# Altium PCB Elevate_sch.PcbDoc (part 2 of 2)
Units mm, origin at the board's own origin, x right, y up, seen from the top; angles counter-clockwise.
Board outline 81.14 x 61.52 mm, 2 copper layers (Top Layer, Bottom Layer), stack 1.554 mm thick; 108 components, 119 nets, 558 pads, 275 vias.
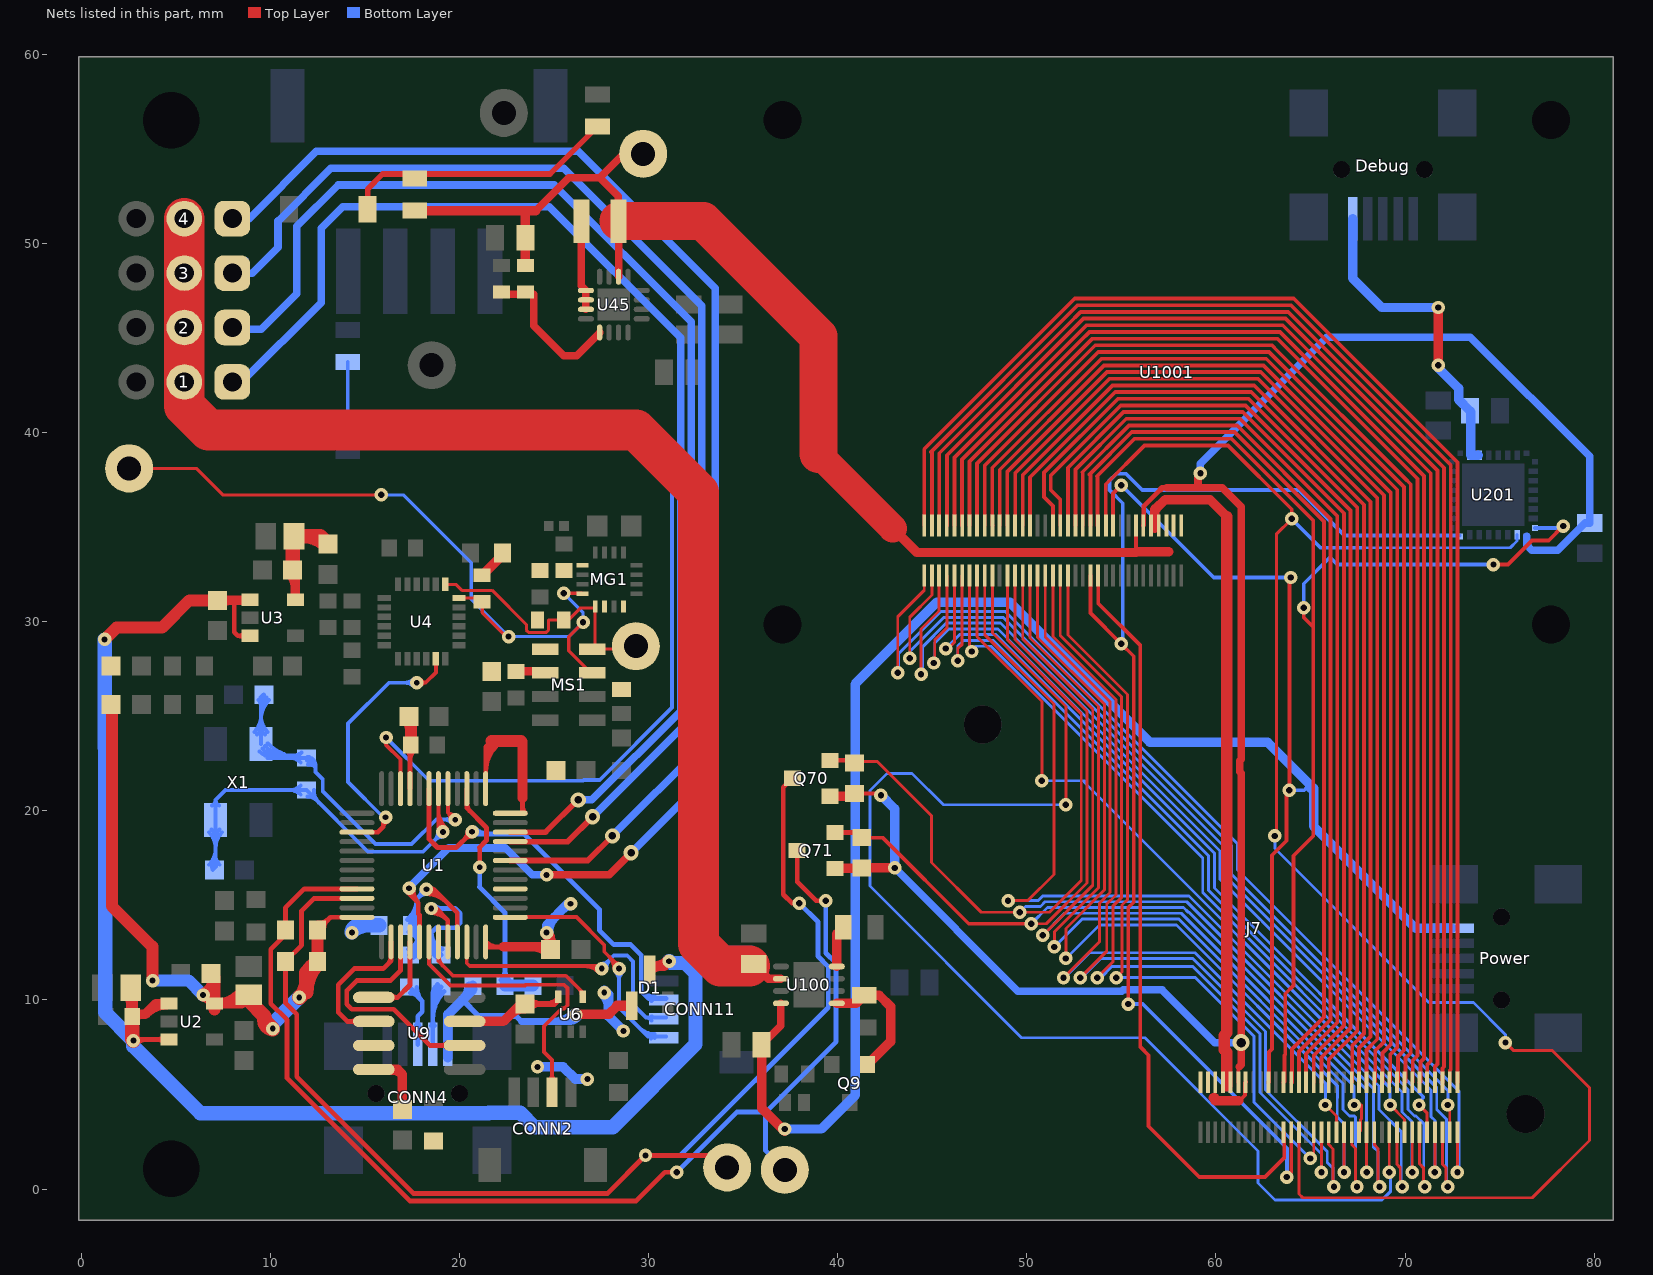
[diagram p2: the nets of this part, all layers, seen from the top]

## Via types
v1: diameter 0.711, hole 0.332, Top Layer to Bottom Layer, 90 vias
v2: diameter 0.8, hole 0.4, Top Layer to Bottom Layer, 85 vias
v3: diameter 0.711, hole 0.305, Top Layer to Bottom Layer, tented both sides, 66 vias
v4: diameter 0.66, hole 0.33, Top Layer to Bottom Layer, tented top, 9 vias
v5: diameter 0.69, hole 0.33, Top Layer to Bottom Layer, 6 vias
v6: diameter 0.5, hole 0.2, Top Layer to Bottom Layer, tented top, 5 vias
v7: diameter 0.5, hole 0.2, Top Layer to Bottom Layer, 5 vias
v8: diameter 1.1, hole 0.7, Top Layer to Bottom Layer, 4 vias
v9: diameter 0.9, hole 0.5, Top Layer to Bottom Layer, 3 vias
v10: diameter 0.73, hole 0.332, Top Layer to Bottom Layer, 1 vias
v11: diameter 1, hole 0.6, Top Layer to Bottom Layer, 1 vias

## Nets (pads, with @x,y where several pads share a name; then routed paths per layer and width w, separated by ;. In a path a pad name is that pad's centre, name@x,y a point inside that pad or via, vN(x,y) a via of type N, cw(c..) or ccw(c..) an arc to the next point about the centre after c; other vN are vias at no path point) (continued)
NetJ7_24: J7.24 U201.32 U1001.24 | length 66.4
  Top Layer w0.2: U1001.24@53.776,35.081 53.747,35.081 53.747,37.665 53.722,37.69 55.699,39.667 60.834,39.667 65.151,35.35 65.151,29.718 ; J7.24@63.576,5.639 63.628,5.691 63.628,7.069 63.67,7.111 63.67,10.33 64.107,10.767 64.107,17.625 65.151,18.669 65.151,29.718 ; v1(64.643,30.734) 64.643,30.226 65.151,29.718 ; v1(74.676,33.02) 75.438,33.02 76.708,34.29 77.597,34.29 v1(78.359,35.052)
  Bottom Layer w0.2: v1(64.643,30.734) 64.643,32.004 66.04,33.401 66.421,33.02 v1(74.676,33.02) ; U201.32@76.876,34.953 78.26,34.953 v1(78.359,35.052)
NetJ7_25: J7.25 U201.8 U1001.25 | length 68.2
  Top Layer w0.2: U1001.25@53.369,32.44 53.369,30.451 v1(54.991,28.829) 55.654,28.166 55.654,15.163 55.372,14.881 v1(55.372,9.779) ; v1(63.754,0.635) 63.983,0.864 J7.25@63.983,2.997
  Bottom Layer w0.2: v1(54.991,28.829) 55.081,28.919 55.081,36.26 54.382,36.959 54.382,37.463 54.739,37.82 55.243,37.82 56.106,36.957 64.389,36.957 66.796,34.55 U201.8@72.879,34.55 ; v1(55.372,9.779) 56.134,9.779 63.754,2.159 v1(63.754,0.635)
NetJ7_26: J7.26 U1001.26 | length 48.4
  Top Layer w0.2: U1001.26@53.369,35.081 53.369,37.729 53.316,37.783 55.553,40.02 60.98,40.02 65.711,35.289 65.711,9.095 64.023,7.407 64.023,5.639 J7.26@63.983,5.639
NetJ7_27: J7.27 U201.2 U1001.22 | length 90.5
  Top Layer w0.154: v1(63.119,18.669) 63.197,18.747 63.197,34.622 v1(64.008,35.433) ; J7.27@64.389,2.997 64.389,-0.254 64.594,-0.459 76.727,-0.459 79.751,2.565 79.751,5.36 77.775,7.336 75.722,7.336 v1(75.311,7.747)
  Top Layer w0.2: U1001.22@54.182,35.081 54.182,37.263 56.233,39.314 60.635,39.314 64.008,35.941 v1(64.008,35.433)
  Bottom Layer w0.154: v1(63.119,18.669) 63.119,17.999 71.26,9.858 73.614,9.858 75.311,8.161 v1(75.311,7.747) ; 67.818,33.909 75.565,33.909 75.926,34.27 U201.2@75.926,34.603
  Bottom Layer w0.2: v1(64.008,35.433) 65.532,33.909 67.818,33.909
NetJ7_28: J7.28 U1001.28 | length 49.5
  Top Layer w0.2: U1001.28@52.963,35.081 52.963,37.873 52.935,37.901 55.407,40.373 61.126,40.373 66.064,35.435 66.064,8.949 64.389,7.274 J7.28@64.389,5.639
NetJ7_30: J7.30 U1001.30 | length 50.7
  Top Layer w0.2: U1001.30@52.582,35.081 52.582,38.047 55.261,40.726 61.273,40.726 66.417,35.582 66.417,8.802 64.77,7.155 J7.30@64.77,5.639
NetJ7_31: J7.31 U1001.31 | length 40.5
  Top Layer w0.152: U1001.31@52.176,32.44 52.176,29.293 55.325,26.144 55.325,15.3 55.043,15.018 55.043,11.482 v1(54.737,11.176) ; v1(64.991,1.618) 65.176,1.803 J7.31@65.176,2.997
  Bottom Layer w0.152: v1(54.737,11.176) 58.928,11.176 62.02,8.084 62.02,4.59 v1(64.991,1.618)
NetJ7_32: J7.32 U1001.32 | length 51.8
  Top Layer w0.2: U1001.32@52.176,35.081 52.176,38.14 55.115,41.079 61.419,41.079 66.77,35.728 66.77,8.656 65.176,7.063 J7.32@65.176,5.639
NetJ7_33: J7.33 U1001.33 | length 44.3
  Top Layer w0.152: U1001.33@51.769,32.364 U1001.33@51.769,32.44 51.769,29.268 55.019,26.018 55.019,15.426 54.57,14.977 54.57,12.025 v1(53.721,11.176) ; v1(65.583,0.889) J7.33@65.583,2.997
  Bottom Layer w0.152: v1(53.721,11.176) 53.91,11.176 54.495,11.761 58.775,11.761 62.326,8.21 62.326,5.111 65.583,1.854 v1(65.583,0.889)
NetJ7_34: J7.34 U1001.34 | length 53.4
  Top Layer w0.2: U1001.34@51.769,35.081 51.769,36.459 51.271,36.957 51.271,37.735 54.968,41.432 61.565,41.432 67.123,35.874 67.123,8.51 65.583,6.97 J7.34@65.583,5.639
NetJ7_35: J7.35 U1001.35 | length 48
  Top Layer w0.152: U1001.35@51.388,32.39 U1001.35@51.388,32.44 51.388,29.217 54.714,25.891 54.714,15.553 54.229,15.068 54.229,12.573 v1(52.832,11.176) ; J7.35@65.964,2.997 65.964,2.349 66.192,2.121 66.192,0.178 v1(66.243,0.127)
  Bottom Layer w0.152: v1(52.832,11.176) 52.894,11.176 53.91,12.192 58.776,12.192 62.631,8.337 62.631,5.238 65.888,1.981 65.888,1.411 66.168,1.131 66.192,1.131 66.192,0.178 v1(66.243,0.127)
NetJ7_36: J7.36 U1001.36 | length 54.6
  Top Layer w0.2: U1001.36@51.388,35.081 51.388,36.115 50.918,36.585 50.918,37.881 54.822,41.785 61.72,41.785 67.476,36.029 67.476,8.364 65.964,6.851 J7.36@65.964,5.639
NetJ7_37: J7.37 U1001.37 | length 43.8
  Top Layer w0.152: U1001.37@50.982,32.44 50.982,29.191 54.409,25.765 54.409,15.679 53.856,15.127 53.856,13.089 v1(51.943,11.176) ; v1(65.786,4.445) 66.37,3.861 J7.37@66.37,2.997
  Bottom Layer w0.152: v1(51.943,11.176) 52.005,11.176 53.326,12.497 58.902,12.497 65.786,5.614 v1(65.786,4.445)
NetJ7_39: J7.39 U1001.39 | length 48
  Top Layer w0.152: U1001.39@50.575,32.44 50.575,29.166 54.103,25.638 54.103,15.806 52.07,13.773 v1(52.07,12.192) ; v1(66.777,0.889) J7.39@66.777,2.997
  Bottom Layer w0.152: v1(52.07,12.192) 53.848,13.97 57.912,13.97 66.421,5.461 66.421,4.815 66.42,4.814 66.42,3.811 66.777,3.454 v1(66.777,0.889)
NetJ7_41: J7.41 U1001.41 | length 50.5
  Top Layer w0.152: U1001.41@50.169,32.44 50.169,29.14 53.798,25.512 53.798,15.932 51.459,13.593 v1(51.459,12.803) ; J7.41@67.183,2.997 67.183,2.349 67.386,2.147 67.386,0.204 v1(67.462,0.127)
  Bottom Layer w0.152: v1(51.459,12.803) 52.931,14.275 58.038,14.275 66.726,5.587 66.726,4.688 66.725,4.687 66.725,4.203 67.068,3.86 67.322,3.86 67.386,3.796 67.386,0.204 v1(67.462,0.127)
NetJ7_42: J7.42 U1001.42 | length 55.3
  Top Layer w0.2: U1001.42@50.169,35.081 50.169,37.631 54.676,42.138 61.875,42.138 67.829,36.184 67.829,8.217 67.209,7.598 J7.42@67.209,5.665
NetJ7_43: J7.43 U1001.43 | length 45.3
  Top Layer w0.152: U1001.43@49.788,32.44 49.788,29.09 53.492,25.385 53.492,16.059 v1(50.848,13.414) ; v1(67.31,4.445) 67.691,4.445 67.691,3.715 67.64,3.664 67.64,3.073 J7.43@67.564,2.997
  Bottom Layer w0.152: v1(50.848,13.414) 52.014,14.581 58.165,14.581 67.31,5.435 v1(67.31,4.445)
NetJ7_44: J7.44 U1001.44 | length 56.5
  Top Layer w0.2: U1001.44@49.788,35.081 49.788,37.749 54.53,42.491 62.03,42.491 62.991,41.53 67.437,37.084 68.182,36.339 68.182,8.071 67.564,7.453 J7.44@67.564,5.639
NetJ7_45: J7.45 Q71.2 R502.1 U1001.45 | length 62.6
  Top Layer w0.152: U1001.45@49.382,32.44 49.382,29.064 53.187,25.259 53.187,16.185 51.027,14.025 v1(50.237,14.025) ; v1(67.97,0.889) J7.45@67.97,2.997
  Top Layer w0.2: R502.1@41.275,18.58 42.38,18.58 46.935,14.025 v1(50.237,14.025)
  Top Layer w0.254: Q71.2@39.862,18.857 40.998,18.857 R502.1@41.275,18.58
  Bottom Layer w0.152: v1(50.237,14.025) 51.097,14.886 58.291,14.886 58.54,14.638 58.58,14.638 67.97,5.247 v1(67.97,0.889)
NetJ7_46: J7.46 U1001.46 | length 57.7
  Top Layer w0.2: U1001.46@49.394,35.133 49.394,37.854 54.383,42.844 62.229,42.844 68.535,36.538 68.535,7.925 67.97,7.36 J7.46@67.97,5.639
NetJ7_47: J7.47 Q70.2 R501.1 U1001.47 | length 67.7
  Top Layer w0.152: R501.1@40.894,22.517 40.983,22.606 42.099,22.606 44.97,19.735 44.97,17.26 47.594,14.636 v1(49.626,14.636) 51.206,14.636 52.882,16.312 52.882,25.132 48.975,29.039 U1001.47@48.975,32.44 ; J7.47@68.377,2.997 68.377,2.349 68.579,2.147 68.579,0.204 v1(68.656,0.127)
  Top Layer w0.254: Q70.2@39.608,22.667 R501.1@40.744,22.667
  Bottom Layer w0.152: v1(49.626,14.636) 49.931,14.942 50.722,14.942 50.971,15.191 58.458,15.191 68.325,5.324 68.325,2.236 68.579,1.982 68.579,0.204 v1(68.656,0.127)
NetJ7_48: J7.48 U1001.48 | length 58.9
  Top Layer w0.2: U1001.48@48.975,35.081 48.975,37.935 54.237,43.197 62.375,43.197 68.888,36.684 68.888,7.779 68.429,7.319 68.429,5.691 J7.48@68.377,5.639
NetJ7_50: J7.50 U1001.50 | length 60.1
  Top Layer w0.2: U1001.50@48.569,35.081 48.569,38.028 53.721,43.18 54.091,43.55 62.521,43.55 69.241,36.83 69.241,7.633 68.81,7.201 68.81,5.665 J7.50@68.783,5.639
NetJ7_51: J7.51 U1001.51 | length 68.8
  Top Layer w0.152: U1001.51@48.188,32.44 48.188,29.394 52.07,25.512 v1(52.07,20.32) ; v1(69.164,0.889) J7.51@69.164,2.997
  Bottom Layer w0.152: v1(52.07,20.32) 45.593,20.32 43.942,21.971 42.607,21.971 41.706,21.07 41.706,16.023 49.728,8.001 56.247,8.001 62.23,2.018 62.23,0.316 63.131,-0.585 68.771,-0.585 69.241,-0.115 v1@69.241,0.812
NetJ7_52: J7.52 U1001.52 | length 61.3
  Top Layer w0.2: U1001.52@48.188,35.081 48.174,35.095 48.174,38.133 53.945,43.903 62.668,43.903 69.594,36.977 69.594,7.486 69.216,7.108 69.216,5.691 J7.52@69.164,5.639
NetJ7_53: J7.53 U1001.53 | length 53
  Top Layer w0.152: U1001.53@47.781,32.44 47.781,29.308 51.435,25.654 51.435,16.637 50.045,15.247 v1(49.015,15.247) ; J7.53@69.571,2.997 69.571,1.31 69.749,1.131 69.749,0.228 v1(69.85,0.127)
  Bottom Layer w0.152: v1(49.015,15.247) 50.595,15.247 50.844,15.497 58.584,15.497 68.63,5.451 68.63,4.203 69.799,3.034 69.799,0.178 v1(69.85,0.127)
NetJ7_54: J7.54 U1001.54 | length 62.4
  Top Layer w0.2: U1001.54@47.781,35.081 47.781,38.256 53.781,44.256 62.814,44.256 69.872,37.198 69.947,37.123 69.947,7.34 69.622,7.016 69.622,5.691 J7.54@69.571,5.639
NetJ7_55: J7.55 U1001.55 | length 40
  Top Layer w0.152: U1001.55@47.375,32.44 47.375,29.206 50.8,25.781 v1(50.8,21.59) ; v1(69.215,4.445) 69.977,3.683 J7.55@69.977,2.997
  Bottom Layer w0.152: v1(50.8,21.59) 52.959,21.59 ; 53.058,21.59 53.058,21.491 69.215,5.334 v1(69.215,4.445)
NetJ7_56: J7.56 U1001.56 | length 63.6
  Top Layer w0.2: U1001.56@47.375,35.081 47.375,38.358 53.626,44.609 62.96,44.609 63.246,44.323 69.977,37.592 70.3,37.269 70.3,7.194 70.029,6.923 70.029,5.691 J7.56@69.977,5.639
NetJ7_57: J7.57 U1001.57 | length 44.3
  Top Layer w0.152: U1001.57@46.969,32.44 46.969,28.549 v1(47.095,28.423) ; v1(70.383,0.889) J7.57@70.383,2.997
  Bottom Layer w0.152: v1(47.095,28.423) 47.095,28.47 47.326,28.702 48.107,28.702 59.309,17.5 59.309,15.672 69.849,5.132 69.849,4.076 70.358,3.567 v1@70.358,0.914
NetJ7_58: J7.58 U1001.58 | length 64.8
  Top Layer w0.2: U1001.58@46.976,35.081 46.976,38.467 53.471,44.962 63.242,44.962 70.653,37.551 70.653,7.048 70.41,6.805 70.41,5.665 J7.58@70.383,5.639
NetJ7_59: J7.59 U1001.59 | length 48.7
  Top Layer w0.152: v1(46.355,27.94) 46.355,28.575 46.588,28.808 U1001.59@46.588,32.44 ; J7.59@70.764,2.997 70.764,1.335 70.968,1.131 70.968,0.203 v1(71.044,0.127)
  Bottom Layer w0.152: v1(46.355,27.94) 46.355,28.702 46.66,29.007 48.234,29.007 59.614,17.627 59.614,15.799 70.154,5.259 70.154,4.203 70.497,3.86 70.586,3.86 70.992,3.454 70.992,0.178 v1(71.044,0.127)
NetJ7_60: J7.60 U1001.60 | length 66
  Top Layer w0.2: U1001.60@46.577,35.081 46.577,38.576 52.832,44.831 53.316,45.315 63.388,45.315 71.006,37.697 71.006,6.902 70.816,6.712 70.816,5.691 J7.60@70.764,5.639
NetJ7_61: J7.61 U1001.61 | length 43.5
  Top Layer w0.152: v1(45.72,28.575) 45.847,28.575 46.181,28.909 U1001.61@46.181,32.44 ; v1(70.739,4.445) 71.171,4.013 J7.61@71.171,2.997
  Bottom Layer w0.152: v1@45.999,28.575 v1(45.72,28.575) 46.458,29.313 48.36,29.313 59.92,17.753 59.92,15.925 70.993,4.852 70.739,4.598 70.892,4.445 v1(70.739,4.445)
NetJ7_62: J7.62 U1001.62 | length 67.2
  Top Layer w0.2: U1001.62@46.178,35.081 46.178,38.685 53.161,45.668 63.534,45.668 71.359,37.843 71.359,6.755 71.171,6.567 J7.62@71.171,5.639
NetJ7_63: J7.63 U1001.63 | length 50.6
  Top Layer w0.152: v1(45.085,27.813) 45.135,27.863 45.135,29.033 45.775,29.672 U1001.63@45.775,32.44 ; v1(71.577,0.889) J7.63@71.577,2.997
  Bottom Layer w0.152: v1(45.085,27.813) 45.135,27.863 45.135,28.879 45.874,29.618 48.487,29.618 60.225,17.88 60.225,16.381 71.373,5.234 71.373,3.822 71.578,3.617 v1(71.577,0.889) 71.577,1.397
NetJ7_64: J7.64 U1001.64 | length 68.4
  Top Layer w0.2: U1001.64@45.778,35.081 45.778,38.793 53.006,46.021 63.681,46.021 71.712,37.99 71.712,6.609 71.577,6.474 J7.64@71.577,5.639
NetJ7_65: J7.65 U1001.65 | length 54.5
  Top Layer w0.152: v1(44.412,27.216) 44.412,29.609 45.368,30.566 U1001.65@45.368,32.44 ; J7.65@71.984,2.997 71.984,1.31 72.162,1.131 72.162,0.228 v1(72.263,0.127)
  Bottom Layer w0.152: v1(44.412,27.216) 44.5,27.128 44.5,28.676 45.748,29.924 48.613,29.924 60.531,18.006 60.531,16.508 71.678,5.36 71.678,4.203 72.186,3.695 72.186,0.204 v1(72.263,0.127)
NetJ7_66: J7.66 U1001.66 | length 69.5
  Top Layer w0.2: U1001.66@45.379,35.081 45.379,38.902 52.197,45.72 52.851,46.374 63.827,46.374 72.065,38.136 72.065,6.463 71.984,6.382 J7.66@71.984,5.639
NetJ7_67: J7.67 U1001.67 | length 47.9
  Top Layer w0.152: v1(43.815,28.067) 43.815,30.237 44.987,31.41 U1001.67@44.987,32.44 ; v1(72.263,4.445) 72.365,4.343 J7.67@72.365,2.997
  Bottom Layer w0.152: v1(43.815,28.067) 43.815,28.423 45.621,30.229 48.74,30.229 60.836,18.133 60.836,16.634 72.263,5.207 v1(72.263,4.445)
NetJ7_68: J7.68 U1001.68 | length 70.8
  Top Layer w0.2: U1001.68@44.987,35.081 44.985,35.081 44.985,38.923 44.934,38.974 52.687,46.727 63.973,46.727 72.418,38.282 72.418,6.317 72.365,6.263 J7.68@72.365,5.639
NetJ7_69: J7.69 U1001.69 | length 55
  Top Layer w0.152: v1(43.18,27.305) 43.18,30.258 44.581,31.659 U1001.69@44.581,32.44 ; v1(72.771,0.889) J7.69@72.771,2.997
  Bottom Layer w0.152: v1(43.18,27.305) 43.23,27.355 43.23,28.309 45.455,30.534 48.866,30.534 61.141,18.259 61.141,16.877 72.848,5.171 72.848,0.966 v1(72.771,0.889)
NetJ7_70: J7.70 U1001.70 | length 71.9
  Top Layer w0.2: U1001.70@44.581,35.081 44.581,39.12 52.541,47.08 64.119,47.08 72.771,38.428 J7.70@72.771,5.639
NetL2_1: L2.1 U45.1 U45.2 U45.3 | length 4.8
  Top Layer w0.4: L2.1@26.457,51.181 26.457,47.748 U45.1@26.694,47.511 U45.2@26.694,47.011 U45.3@26.694,46.511
NetMAGNETO1_1: MG1.1 MS1.8 MSCL.1 R511.1 U4.7 | length 15.1
  Top Layer w0.16: U4.7@19.259,31.977 19.812,31.977 20.136,31.653 21.736,31.653 23.544,29.845 23.544,29.552 23.68,29.416 24.574,29.416 24.71,29.552 24.71,30.099 R511.1@25.527,30.099 25.781,30.099 26.416,30.734 27.112,30.734 MG1.1@27.18,30.803 27.18,28.694 MS1.8@27.031,28.545 29.18,28.545 MSCL.1@29.337,28.702 MSCL.1@29.113,28.926
NetMAGNETO1_16: MG1.16 MS1.7 MSDA.1 R512.1 U4.6 | length 39.7
  Top Layer w0.17: MSDA.1@2.54,38.1 6.096,38.1 7.493,36.703 v1(15.875,36.703) ; U4.6@19.984,31.252 21.007,31.252 R512.1@21.209,31.05 21.209,30.48 22.479,29.21 v1(22.606,29.21) ; v1(25.527,31.496) 26.487,31.496 MG1.16@26.503,31.48 ; v1@26.543,29.775 v1(26.543,29.972) 25.781,29.21 25.781,28.458 26.944,27.295 MS1.7@27.031,27.295
  Bottom Layer w0.17: v1(15.875,36.703) 17.045,36.703 20.634,33.113 20.634,31.182 v1(22.606,29.21) 25.781,29.21 v1(26.543,29.972) 26.543,30.48 v1(25.527,31.496) v1@25.441,31.41
NetQ9_1: Q9.1 R1001.1 U100.1 | length 6.8
  Top Layer w0.5: U100.1@39.956,9.82 40.974,9.82 R1001.1@41.402,10.248 42.203,10.248 42.799,9.652 42.799,7.797 Q9.1@41.59,6.588
NetR47_1: R47.1 R48.1 SW1UI2.1 | length 14.6
  Top Layer w0.3: SW1UI2.1@15.156,51.816 15.156,52.875 15.947,53.666 24.798,53.666 R47.1@27.305,56.173
NetR111_1: R111.1 R112.2 U45.5 | length 7.8
  Top Layer w0.4: R112.2@22.479,47.433 22.606,47.306 23.749,47.306 23.939,47.306 23.939,45.657 25.527,44.069 26.201,44.069 U45.5@27.419,45.286
NetR1000_2: R1000.2 U100.4 | length 2.2
  Top Layer w0.5: U100.4@39.956,11.77 39.956,13.501 R1000.2@40.298,13.843
NetR2000_2: R2000.2 R2001.1 U1.10 | length 54.6
  Top Layer w0.2: v1(16.129,23.876) 16.129,23.486 16.894,22.722 U1.10@16.894,21.17
  Bottom Layer w0.2: R2001.1@14.097,43.727 R2000.2@14.097,40.728 28.624,40.728 31.252,38.1 31.252,25.459 27.427,21.634 26.581,21.634 26.537,21.59 18.415,21.59 v1(16.129,23.876)
NetU1_26: U1.26 U9.6 | length 8.9
  Top Layer w0.254: U9.6@14.559,8.742 ccw(c14.264,8.447) 14.264,8.865 ccw(c14.264,9.282) U9.6@14.559,8.987 ; U9.6@15.482,8.865 14.072,8.865 13.594,9.342 13.594,10.8 14.453,11.659 15.977,11.659 16.394,12.076 U1.26@16.394,13.07 ; 16.242,11.924 ccw(c15.888,12.277) U1.26@16.388,12.277
NetU1_27: U1.27 U9.2 | length 13.3
  Top Layer w0.254: U1.27@16.894,13.07 16.894,11.56 16.358,11.024 14.58,11.024 14.051,10.495 14.051,9.774 14.321,9.504 16.533,9.504 16.912,9.126 18.443,7.595 U9.2@20.282,7.595 ; U9.2@19.359,7.472 ccw(c19.064,7.177) 19.064,7.595 ccw(c19.064,8.012) U9.2@19.359,7.717
NetU1_28: U1.28 U9.5 | length 5.1
  Top Layer w0.254: U9.5@15.482,10.135 16.739,10.135 17.394,10.79 U1.28@17.394,13.07 ; U9.5@16.404,10.012 cw(c16.699,9.717) 16.699,10.135 cw(c16.699,10.552) U9.5@16.404,10.257
NRST: CONN11.2 U1.7 | length 23.9
  Top Layer w0.254: U1.7@18.394,21.17 18.394,18.513 18.847,18.059 19.837,18.059 20.549,18.771 20.676,18.771 v3(20.676,18.898) ; v3@20.447,18.898 cw(c19.895,18.898) 20.285,18.507 cw(c20.676,18.117) v3@20.676,18.669
  Bottom Layer w0.254: v3(20.676,18.898) 20.676,18.771 23.423,18.771 27.407,14.787 27.407,13.691 28.169,12.929 29.058,12.929 29.616,12.37 29.616,10.465 ; v3@20.837,19.059 ccw(c21.534,19.756) 21.534,18.771 ; CONN11.2@30.166,9.953 ccw(c30.012,9.909) 30.012,10.069 ; CONN11.2@30.331,10.173 cw(c30.322,11.17) 29.616,10.465 ; CONN11.2@30.935,10.069 30.012,10.069 ; 29.616,10.465 30.012,10.069
OSC_IN: C29.2 R15.2 U1.5 X1.3 | length 35.8
  Top Layer w0.203: U1.5@19.394,21.17 19.394,19.915 ; v3@19.528,19.548 ccw(c19.065,19.586) 19.394,19.915 ; v3@19.761,19.781 cw(c19.723,20.244) 19.394,19.915 ; v3(19.782,19.528) 19.394,19.915
  Bottom Layer w0.203: X1.3@9.16,24.173 ccw(c8.309,25.024) 9.513,25.024 ccw(c10.716,25.024) X1.3@9.865,24.173 ; X1.3@9.304,24.029 ccw(c8.8,24.533) 9.513,24.533 ccw(c10.225,24.533) X1.3@9.721,24.029 ; C29.2@9.383,25.855 cw(c9.07,25.542) 9.513,25.542 ; X1.3@9.434,23.142 ccw(c10.27,23.978) 10.27,22.796 ; X1.3@9.513,23.521 C29.2@9.513,25.985 ; 9.513,24.808 cw(c10.993,24.808) C29.2@9.946,25.855 ; 9.513,25.298 cw(c10.503,25.298) C29.2@9.803,25.999 ; X1.3@9.578,23.286 ccw(c10.761,24.469) 10.761,22.796 ; X1.3@9.721,23.429 ccw(c11.251,24.959) 11.251,22.796 ; X1.3@9.842,22.796 R15.2@11.913,22.796 12.395,22.313 ; X1.3@9.865,23.573 ccw(c11.742,25.45) R15.2@11.742,22.796 ; 10.98,22.933 ccw(c11.142,23.832) R15.2@11.664,23.082 ; 11.082,22.914 cw(c10.946,22.158) R15.2@11.577,22.597 ; R15.2@11.616,22.549 ccw(c11.021,21.955) 11.021,22.796 ccw(c11.021,23.637) R15.2@11.616,23.042 ; R15.2@11.949,22.651 cw(c11.902,22.16) 12.395,22.16 ; R15.2@11.968,22.853 cw(c11.923,22.383) R15.2@12.395,22.383 ; R15.2@12.003,22.45 cw(c12.058,21.976) 12.395,22.313 ; R15.2@12.297,22.698 ccw(c12.67,22.588) 12.395,22.313 ; 19.135,19.541 cw(c19.135,18.881) v3@19.602,19.348 ; 19.202,19.541 ccw(c19.202,20.107) v3@19.602,19.707 ; v3@19.541,19.446 ccw(c19.408,19.402) 19.408,19.541 ; v3@19.55,19.633 cw(c19.408,19.697) 19.408,19.541 ; v3(19.782,19.528) 19.765,19.511 19.439,19.511 19.408,19.541 ; 12.395,22.313 12.395,22.053 12.776,21.672 12.776,21.037 15.576,18.237 17.475,18.237 18.779,19.541 19.408,19.541
  Bottom Layer w0.254: C29.2@9.513,25.985 C29.2@9.665,26.137
OSC_OUT: C33.2 R15.1 U1.6 X1.1 | length 31.5
  Top Layer w0.203: 18.894,19.586 ccw(c19.84,19.586) v3@19.171,18.917 ; 18.894,20.077 ccw(c20.331,20.077) v3@19.315,19.061 ; U1.6@18.894,21.17 18.894,19.122 v3(19.135,18.881)
  Bottom Layer w0.203: X1.1@6.76,18.868 cw(c5.909,18.017) 7.113,18.017 cw(c8.316,18.017) X1.1@7.465,18.868 ; C33.2@6.767,17.147 ccw(c5.932,17.982) 7.113,17.982 ; X1.1@6.904,19.012 cw(c6.4,18.508) 7.113,18.508 cw(c7.825,18.508) X1.1@7.321,19.012 ; C33.2@6.911,17.004 ccw(c6.423,17.491) 7.113,17.491 ; X1.1@6.917,20.279 ccw(c6.791,20.575) 7.113,20.575 ; C33.2@7.113,17.057 X1.1@7.113,19.521 7.113,20.575 ; 7.113,17.673 ccw(c7.856,17.673) C33.2@7.33,17.147 ; X1.1@7.308,20.279 cw(c7.434,20.575) 7.113,20.575 ; R15.1@11.616,20.849 ccw(c11.021,20.254) 11.021,21.096 ccw(c11.021,21.937) R15.1@11.616,21.342 ; R15.1@11.963,20.747 cw(c11.963,20.027) 12.472,20.536 ; R15.1@12.311,21.096 ccw(c13.273,21.096) 12.593,20.415 ; v3@18.881,18.881 cw(c18.268,18.881) 18.701,18.447 cw(c19.135,18.014) v3@19.135,18.627 ; v3@19.152,18.898 v3(19.135,18.881) 18.085,17.831 15.177,17.831 R15.1@11.913,21.096 7.634,21.096 7.113,20.575
  Bottom Layer w0.254: C33.2@6.96,16.904 C33.2@7.113,17.057
S1_OUT: 1.1 U1.46 | length 64.2
  Top Layer w0.254: v2@26.265,20.574 v2(26.289,20.574)
  Top Layer w0.3: U1.46@22.694,18.87 24.561,18.87 v2@26.265,20.574
  Bottom Layer w0.4: 1.1@8.001,42.672 8.509,42.672 12.7,46.863 12.7,50.8 13.843,51.943 24.765,51.943 31.705,45.003 31.705,25.272 27.007,20.574 v2(26.289,20.574) v2@26.162,20.574
S2_OUT: 2.1 U1.45 | length 66.3
  Top Layer w0.3: U1.45@22.694,18.37 25.736,18.37 v2(27.051,19.685)
  Bottom Layer w0.4: 2.1@7.405,45.466 9.525,45.466 11.404,47.345 11.404,50.901 13.589,53.086 25.019,53.086 32.258,45.847 32.258,24.892 v2(27.051,19.685)
S3_OUT: 3.1 U1.43 | length 68
  Top Layer w0.3: U1.43@22.694,17.37 26.794,17.37 v2(28.093,18.669)
  Bottom Layer w0.254: 3.1@7.982,48.222 3.1@8.095,48.335 ; 3.1@8.001,48.429 3.1@8.721,49.149
  Bottom Layer w0.4: 3.1@8.001,48.429 9.059,48.429 10.414,49.784 10.414,51.181 13.208,53.975 25.527,53.975 32.811,46.691 32.811,23.387 v2(28.093,18.669)
S4_OUT: 4.1 U1.29 | length 79.5
  Top Layer w0.254: v3(17.342,15.911) 17.312,15.911 17.247,15.977 17.247,15.723 17.831,15.138 ; v3@17.57,15.885 ccw(c18.475,15.783) 17.831,15.138 ; U1.29@17.894,13.07 17.894,14.487 17.831,14.55 17.831,15.138
  Top Layer w0.4: v3(24.613,16.612) 27.915,16.612 v2(29.083,17.78)
  Bottom Layer w0.4: 4.1@8.001,51.308 8.89,51.308 12.446,54.864 26.289,54.864 33.528,47.625 33.528,22.225 v2(29.083,17.78) ; v3@17.312,15.911 19.436,18.034 22.428,18.034 23.851,16.612 v3(24.613,16.612)
S5_OUT: U1.40
SCK: U1.15 U4.23 | length 16.3
  Top Layer w0.203: v3(17.755,26.772) 18.218,26.772 ; v3@17.969,26.635 cw(c18.218,26.477) 18.218,26.772 ; v3@17.969,26.908 ccw(c18.218,27.067) 18.218,26.772 ; U4.23@18.759,28.027 18.759,27.313 18.218,26.772
  Top Layer w0.254: U1.15@14.594,18.87 15.695,18.87 15.977,19.152 15.977,19.533 v3(16.104,19.66) ; 15.977,19.136 cw(c16.311,19.136) v3@16.188,19.447
  Bottom Layer w0.203: v3(16.104,19.66) 15.977,19.66 14.122,21.514 14.122,24.613 16.281,26.772 v3(17.755,26.772) ; v3@17.575,26.592 ccw(c17.141,26.158) 17.141,26.772 ccw(c17.141,27.385) v3@17.575,26.951
SWDCLK: CONN11.4 U1.37 | length 16.3
  Top Layer w0.203: U1.37@22.7,14.376 26.194,14.376 27.661,12.91 27.661,12.548 v3@28.448,11.76 ; 27.943,12.266 cw(c27.336,11.659) v3@28.194,11.659 ; 28.188,12.02 ccw(c28.448,12.281) v3@28.448,11.913
  Top Layer w0.254: U1.37@22.694,14.37 U1.37@22.7,14.376 ; v3(28.448,11.659) v3@28.448,11.76
  Bottom Layer w0.203: v3@28.268,11.479 cw(c27.835,11.045) 28.448,11.045 cw(c29.061,11.045) v3@28.628,11.479 ; v3(28.448,11.659) 28.448,9.601 29.98,8.069 ; 29.511,8.538 ccw(c30.333,9.36) CONN11.4@30.333,8.198 ; 29.858,8.191 ccw(c30.333,8.666) CONN11.4@30.333,7.995 ; 30.021,8.069 ccw(c30.021,8.311) CONN11.4@30.192,8.14 ; CONN11.4@30.141,7.946 ccw(c29.98,7.902) 29.98,8.069 ; CONN11.4@30.935,8.069 29.98,8.069
  Bottom Layer w0.254: v3(28.448,11.659) v3@28.677,11.659
SWDIO: CONN11.3 U1.34 | length 17.6
  Top Layer w0.203: U1.34@20.394,13.07 20.394,11.941 20.549,11.786 27.534,11.786 v3(27.534,11.659) ; 26.614,11.786 cw(c26.614,10.739) v3@27.354,11.479 ; 27.104,11.786 cw(c27.104,11.229) v3@27.498,11.623
  Bottom Layer w0.203: v3@27.534,11.714 28.164,12.344 28.88,12.344 29.185,12.04 29.185,9.754 29.869,9.069 ; v3@27.534,11.913 ccw(c27.534,12.392) 27.873,12.053 ; v3@27.788,11.659 cw(c28.535,11.659) 28.006,12.187 ; 30.021,9.069 ccw(c30.021,9.311) CONN11.3@30.192,9.14 ; CONN11.3@30.161,8.901 ccw(c29.869,8.733) 29.869,9.069 ; CONN11.3@30.935,9.069 29.869,9.069
  Bottom Layer w0.254: v3(27.534,11.659) v3@27.534,11.714
TO_REGS: C1.1 C2.1 C3.1 D1.3 U2.1 U2.3 U3.1 U3.3 | length 87.4
  Top Layer w0.254: v3@2.707,7.911 3.977,7.911 3.979,7.908 U2.3@4.661,7.908 ; v3@2.93,7.687 cw(c3.47,7.147) 3.47,7.911 ; v3@2.93,8.01 ccw(c3.171,8.251) 3.171,7.911 ; U2.3@4.396,7.768 ccw(c4.058,7.43) 4.058,7.908 ccw(c4.058,8.386) U2.3@4.396,8.048 ; 8.103,31.128 8.103,29.439 8.291,29.251 U3.3@8.935,29.251 ; U3.3@8.67,29.111 ccw(c8.332,28.773) 8.332,29.251 ccw(c8.332,29.729) U3.3@8.67,29.391
  Top Layer w0.508: C2.1@2.642,9.246 2.707,9.246 3.404,9.246 3.966,9.808 U2.1@4.661,9.808 ; 2.707,8.546 C2.1@2.707,9.119 ; C2.1@2.81,9.065 cw(c3.245,8.63) 3.245,9.246 ; 3.442,9.284 cw(c4.536,8.19) U2.1@4.536,9.737 ; C1.1@7.214,31.128 8.103,31.128 8.912,31.128 U3.1@8.935,31.151 ; C1.1@7.388,30.954 cw(c7.808,30.534) 7.808,31.128 cw(c7.808,31.722) C1.1@7.388,31.302 ; D1.3@30.074,11.593 D1.3@30.267,11.786 ; D1.3@30.106,11.56 cw(c30.651,11.016) 30.651,11.786 ; v3@31.016,12.109 cw(c30.267,12.814) D1.3@30.267,11.786 ; v3(31.09,12.04) 30.836,11.786 D1.3@30.267,11.786
  Top Layer w0.635: v3(1.245,29.058) 1.88,29.693 4.293,29.693 5.728,31.128 C1.1@7.214,31.128 ; C3.1@2.465,10.328 cw(c1.882,9.745) 2.707,9.745 ; C3.1@2.63,10.643 2.707,10.566 2.707,9.246 C2.1@2.707,9.119
  Top Layer w0.762: 2.707,8.546 2.707,7.911 v3(2.769,7.849)
  Bottom Layer w0.762: v3(1.245,29.058) 1.245,23.343 1.27,23.317 1.27,9.347 v3(2.769,7.849) 2.769,7.562 6.314,4.016 21.542,4.016 21.565,4.039 23.216,4.039 23.978,3.277 28.109,3.277 32.487,7.654 32.487,11.418 31.952,11.953 31.176,11.953 v3(31.09,12.04)
UART1_RX: U1.31 U6.4 | length 10.3
  Top Layer w0.203: U1.31@18.894,13.07 18.894,12.044 19.66,11.278 25.631,11.278 26.533,10.376 U6.4@26.533,10.171 ; U1.31@18.924,12.277 ccw(c19.563,12.277) 19.111,11.826 ; 26.368,10.541 cw(c26.147,10.321) U6.4@26.459,10.321
UART1_TX: CONN2.3 U1.30 | length 16
  Top Layer w0.203: U1.30@18.394,13.07 18.394,11.909 19.533,10.77 23.47,10.77 23.5,10.8 25.534,10.8 25.712,10.622 25.712,9.719 25.534,9.541 25.416,9.541 24.486,8.611 24.486,7.239 24.903,6.822 CONN2.3@24.903,5.127 ; CONN2.3@24.762,5.742 ccw(c24.424,6.081) 24.903,6.081 ccw(c25.382,6.081) CONN2.3@25.043,5.742
UART3_RX: Q70.3 R21.1 SDA.1 U1.22 | length 65.6
  Top Layer w0.254: U1.22@14.594,15.37 12.322,15.37 11.659,14.707 11.659,12.89 R21.1@10.809,12.04 10.809,9.842 11.405,9.246 11.405,5.935 17.568,-0.228 27.839,-0.228 v1(29.845,1.778) 33.528,1.778 SDA.1@34.163,1.143 ; Q70.3@37.608,21.717 37.132,21.241 37.132,15.573 37.592,15.113 v1(37.973,15.113)
  Bottom Layer w0.254: v1(29.845,1.778) 31.69,1.778 39.511,9.599 39.511,11.765 38.963,12.313 38.963,14.123 v1(37.973,15.113) v1@37.836,15.113
UART3_TX: Q71.3 R20.1 SCL.1 U1.21 | length 63.8
  Top Layer w0.254: U1.21@14.594,15.87 11.806,15.87 10.809,14.873 R20.1@10.809,13.691 10.809,13.457 10.028,12.676 10.028,9.809 10.897,8.941 10.897,5.867 17.399,-0.635 29.337,-0.635 30.861,0.889 v1(31.496,0.889) ; Q71.3@37.862,17.907 37.862,16.24 38.862,15.24 v1(39.37,15.24)
  Bottom Layer w0.254: v1(31.496,0.889) 34.676,4.069 36.195,4.069 ; SCL.1@37.211,1.016 36.195,2.032 36.195,4.069 ; v1(39.37,15.24) 39.37,12.481 39.918,11.933 39.918,7.792 36.195,4.069
USB_D_N: R11.1 U1.32 | length 13.5
  Top Layer w0.254: v3@18.517,14.605 cw(c18.517,13.44) 19.34,14.264 ; v3(18.517,14.834) 18.771,14.834 19.394,14.211 U1.32@19.394,13.07 ; v3@18.517,14.859 cw(c18.517,14.307) 18.907,14.697
  Bottom Layer w0.254: 18.517,12.795 ccw(c19.151,12.795) R11.1@18.902,12.211 ; 18.517,13.179 ccw(c19.315,13.179) R11.1@19.002,12.445 ; v3(18.517,14.834) 19.787,14.834 20.041,14.58 20.041,14.072 19.787,13.818 18.771,13.818 18.517,13.564 ; R11.1@18.657,12.44 ccw(c18.158,12.531) 18.517,12.89 ; v3@18.678,14.672 cw(c19.068,14.282) 19.068,14.834 cw(c19.068,15.385) v3@18.678,14.995 ; R11.1@18.971,12.705 cw(c18.963,13.336) 18.517,12.89 ; R11.1@19.025,12.382 18.517,12.89 ; R11.1@19.101,12.679 cw(c19.478,13.564) 18.517,13.564 ; 18.517,12.89 18.517,13.564
USB_D_P: R13.1 R14.2 U1.33 | length 19.4
  Top Layer w0.254: v3@18.263,15.621 cw(c18.263,14.149) 19.303,15.19 ; v3(18.263,15.85) 18.644,15.85 ; v3@18.263,15.875 cw(c18.263,15.017) 18.87,15.624 ; v3@18.464,15.742 cw(c18.644,15.646) 18.644,15.85 ; v3@18.464,15.957 ccw(c18.644,16.053) 18.644,15.85 ; U1.33@19.894,13.07 19.894,14.6 18.644,15.85
  Bottom Layer w0.254: R14.2@17.254,14.242 ccw(c16.314,15.367) 17.78,15.367 ; R13.1@17.306,12.683 ccw(c16.978,13.525) R14.2@17.882,13.525 ; R14.2@17.344,13.594 cw(c17.035,12.805) 17.882,12.805 ; R13.1@17.374,12.382 17.882,12.89 ; R13.1@17.399,12.446 ccw(c17.123,13.153) 17.882,13.153 ; R14.2@17.417,14.048 ccw(c16.769,14.823) 17.78,14.823 ; R13.1@17.427,12.705 ccw(c17.435,13.336) 17.882,12.89 ; R14.2@17.436,13.83 cw(c17.181,13.178) 17.882,13.178 ; R13.1@17.491,12.209 ccw(c17.268,12.781) 17.882,12.781 ; R14.2@17.529,14.067 cw(c17.327,13.55) R14.2@17.882,13.55 ; R13.1@17.741,12.44 cw(c18.24,12.531) 17.882,12.89 ; v3@18.034,15.85 cw(c17.482,15.85) 17.872,15.459 cw(c18.263,15.069) v3@18.263,15.621 ; v3(18.263,15.85) 17.78,15.367 ; 17.78,15.367 17.78,14.263 R14.2@17.462,13.945 R14.2@17.882,13.525 ; 17.882,12.89 R14.2@17.882,13.525
USB_PWR: CONN4.1 D1.1 R2.1 | length 17.3
  Top Layer w0.508: v3(26.155,9.228) 26.173,9.246 27.915,9.246 28.362,9.693
  Top Layer w0.559: 28.362,9.693 D1.1@29.124,9.693
  Bottom Layer w0.305: 20.168,10.008 21.019,9.156 22.999,9.156 23.291,8.865
  Bottom Layer w0.381: 23.291,8.865 25.792,8.865 v3(26.155,9.228) ; 24.88,8.865 ccw(c24.88,10.503) v3@26.038,9.344 ; 25.799,8.865 ccw(c25.799,9.583) v3@26.307,9.075 ; v3@25.989,9.228 cw(c25.591,9.228) 25.873,8.946 cw(c26.155,8.664) v3@26.155,9.063
  Bottom Layer w0.508: CONN4.1@19.399,6.954 CONN4.1@19.399,7.651 19.399,9.239 20.168,10.008 20.715,10.555 R2.1@20.715,10.77 ; 20.263,10.103 ccw(c19.647,10.72) R2.1@20.519,10.72
USB_R_N: CONN4.2 R11.2 | length 7.1
  Bottom Layer w0.254: CONN4.2@18.512,8.638 ccw(c18.302,8.848) 18.599,8.848 ccw(c18.896,8.848) CONN4.2@18.686,8.638 ; CONN4.2@18.599,7.651 18.599,10.256 R11.2@19.025,10.682 ; 18.599,8.994 cw(c20.662,8.994) R11.2@19.203,10.453 ; 18.599,9.607 cw(c20.049,9.607) R11.2@19.023,10.633 ; 18.599,10.22 cw(c19.436,10.22) R11.2@18.844,10.812
USB_R_P: CONN4.3 R13.2 | length 5.8
  Bottom Layer w0.254: R13.2@17.374,10.682 17.799,10.257 17.799,10.178 ; CONN4.3@17.712,8.638 ccw(c17.502,8.848) 17.799,8.848 ccw(c18.096,8.848) CONN4.3@17.886,8.638 ; R13.2@17.722,10.559 ccw(c18.046,10.426) 17.799,10.179 ; R13.2@17.746,10.672 ccw(c18.741,10.643) 18.038,9.94 ; CONN4.3@17.799,7.651 17.799,9.133 18.038,9.371 18.038,9.94 ; 17.799,10.178 18.038,9.94 ; R13.2@17.424,10.359 cw(c17.424,9.888) 17.756,10.221 ccw(c17.424,9.888) R13.2@17.424,10.359
V_1P80: C1001.1 J7.12 Q70.1 Q71.1 R501.2 R502.2 U201.1 U1001.12 | length 104.7
  Top Layer w0.2: R501.2@40.894,20.917 v1@42.126,20.917 ; J7.12@61.189,5.639 61.189,6.474
  Top Layer w0.25: U1001.12@56.163,35.081 56.19,35.108 56.19,36.109 57.058,36.977
  Top Layer w0.3: 57.058,36.977 57.165,37.084 57.404,37.084
  Top Layer w0.4: 57.404,37.084 59.055,37.084 ; v1(59.182,37.846) 59.055,37.719 59.055,37.084 ; 61.232,6.474 61.341,6.583 v9(61.341,7.747) 61.341,21.985 61.267,22.058 61.267,22.646 61.341,22.719 61.341,36.068 60.325,37.084 59.055,37.084
  Top Layer w0.5: Q70.1@39.608,20.767 R501.2@40.744,20.767 ; Q71.1@39.862,16.957 R502.2@41.252,16.957 ; R502.2@41.275,16.98 v1(43.015,16.98)
  Bottom Layer w0.4: v1(43.015,16.98) 49.528,10.467 55.031,10.467 55.104,10.541 57.15,10.541 59.944,7.747 v9(61.341,7.747) ; v1(59.182,37.846) 59.182,38.354 65.86,45.032 73.459,45.032 79.756,38.735 C1001.1@79.756,35.217 79.526,35.217 78.086,33.777 76.713,33.777 76.429,34.061 U201.1@76.429,34.503
  Bottom Layer w0.5: v1(42.291,20.828) 43.015,20.104 v1(43.015,16.98)
V_3P30: J7.8 J7.10 U1001.8 U1001.10 | length 35.6
  Top Layer w0.5: 56.769,34.925 56.769,35.941 56.828,36 56.868,36 57.316,36.449 59.69,36.449 60.579,35.56
  Top Layer w0.6: 60.579,5.461 60.579,7.232 60.438,7.373 60.438,8.121 60.579,8.262 60.579,35.56
V_SYS: C54.2 J7.2 J7.4 J7.6 J7.14 L2.2 R48.2 R111.2 U45.14 U1001.2 U1001.4 U1001.6 U1001.14 VSYS.1 | length 66.4
  Top Layer w0.2: 55.782,33.684 U1001.14@55.782,35.081 ; 61.214,4.664 61.245,4.664 61.543,4.963 61.543,5.612 J7.14@61.57,5.639 J7.14@61.592,5.661
  Top Layer w0.4: 23.495,51.728 24.042,51.728 25.781,53.467 27.432,53.467 ; L2.2@28.407,51.181 28.407,52.492 27.432,53.467 ; U45.14@28.419,48.236 L2.2@28.419,51.169 ; VSYS.1@29.718,54.737 28.702,54.737 27.432,53.467
  Top Layer w0.5: R48.2@17.653,51.728 24.042,51.728 ; R111.2@23.495,48.833 C54.2@23.495,50.292 23.495,51.728 ; L2.2@28.407,51.181 L2.2@28.419,51.169 ; 42.926,34.925 44.196,33.655 55.782,33.655 ; 55.782,33.684 57.502,33.684 ; 59.871,4.828 59.944,4.828 59.944,4.699 59.979,4.664 61.214,4.664
  Top Layer w1.5: 38.989,38.862 42.926,34.925
  Top Layer w2: L2.2@28.407,51.181 32.893,51.181 38.989,45.085 38.989,38.862
V_VBAT_BKUP: J7.23 U1001.23 | length 40.3
  Top Layer w0.2: U1001.23@53.776,32.44 53.776,30.977 56.007,28.745 56.007,7.505 56.44,7.071 56.44,3.317 59.123,0.635 62.596,0.635 63.61,1.649 63.61,2.963 J7.23@63.576,2.997
VBUS: C56.1 J7.20 Power.1 U100.8 U1001.20 | length 128.8
  Top Layer w0.2: U1001.20@54.563,35.081 54.563,36.783 v1(54.991,37.211) ; J7.20@62.789,5.639 62.815,5.665 62.815,7.255 62.964,7.404 62.964,17.653 63.728,18.417 63.728,20.929 v1(63.881,21.082) 63.881,32.258 63.907,32.284 v1@63.907,21.056
  Top Layer w0.4: C56.1@35.979,7.62 37.006,8.647 U100.8@37.006,9.82 ; v1@37.211,3.048 v1(37.211,3.175)
  Top Layer w0.5: C56.1@35.979,7.62 35.979,4.28 v1@37.211,3.048
  Bottom Layer w0.2: v1(54.991,37.211) 55.011,37.211 59.89,32.331 59.894,32.335 v1(63.958,32.335) ; v1(63.881,21.082) 64.668,21.082 64.795,21.209 65.176,20.828
  Bottom Layer w0.5: v1(37.211,3.175) 39.144,3.175 40.922,4.953 40.922,26.698 45.238,31.014 49.123,31.014 56.515,23.622 62.738,23.622 65.176,21.184 65.176,20.828 65.176,19.177 70.561,13.792 Power.1@72.505,13.792
VBUS_2: C901.1 Debug.1 U201.18 U201.19 | length 17.2
  Top Layer w0.5: v1(71.755,43.561) v1(71.755,46.609)
  Bottom Layer w0.5: Debug.1@67.234,51.296 67.234,48.147 68.772,46.609 v1(71.755,46.609) ; v1(71.755,43.561) 71.755,43.414 72.833,42.336 72.833,41.741 C901.1@73.426,41.148 73.479,41.095 73.479,38.803 U201.19@73.873,38.803
VBUS_SEN: R2.2 R3.2 U1.3 | length 14.7
  Top Layer w0.254: U1.3@20.394,21.17 20.394,20.149 21.438,19.105 21.438,18.437 21.057,18.055 21.082,18.029 v3(21.082,17.018) ; U1.3@20.399,20.377 ccw(c20.962,20.377) 20.564,19.979
  Bottom Layer w0.254: v3(21.082,17.018) 21.082,16.002 21.057,15.977 22.415,14.619 R2.2@22.415,10.77 ; R2.2@22.186,11.048 ccw(c21.635,11.599) 22.415,11.599 ccw(c23.194,11.599) R2.2@22.643,11.048
  Bottom Layer w0.635: R2.2@22.415,10.77 R3.2@23.89,10.77
VCC: C4.1 C5.1 C28.2 C30.2 C34.2 C35.1 C36.2 C38.1 C39.1 C1122.2 C1123.2 C1124.2 D2.2 D5.2 JP7.2 MG1.2 MG1.4 MG1.13 MS1.1 MS1.2 R14.1 R17.1 R20.2 R21.2 R22.2 R511.2 R512.2 U1.1 U1.9 U1.24 U1.36 U1.48 U2.5 U6.5 U9.3 U9.7 U9.8 | length 102.2
  Top Layer w0.254: R20.2@12.509,13.691 13.188,14.37 U1.24@14.594,14.37 ; R20.2@12.509,14.064 ccw(c12.509,14.964) 13.145,14.327 ; R20.2@12.832,13.741 cw(c13.491,13.741) 13.025,14.207 ; C35.1@17.243,23.227 cw(c16.878,22.862) 17.394,22.862 ; U1.9@17.394,21.17 17.394,23.428 C35.1@17.436,23.47 ; 17.394,22.659 cw(c18.196,22.659) C35.1@17.629,23.227 ; U1.36@21.394,13.07 21.394,12.846 21.438,12.802 22.327,12.802 ; U1.1@21.394,21.17 21.394,23.388 21.692,23.686 ; U1.1@21.394,22.066 cw(c23.311,22.066) 21.955,23.422 ; 21.394,22.679 cw(c22.698,22.679) 21.776,23.601 ; U1.36@21.397,13.073 ccw(c22.054,13.73) 22.054,12.802 ; U1.48@23.343,19.914 23.343,20.676 ; 23.343,20.229 ccw(c23.846,20.229) U1.48@23.49,19.873
  Top Layer w0.305: C39.1@23.47,9.792 25.02,9.792 25.233,10.004 U6.5@25.233,10.171 ; C39.1@23.715,9.546 cw(c24.309,8.952) 24.309,9.792 cw(c24.309,10.631) C39.1@23.715,10.037 ; 24.625,9.792 ccw(c24.625,10.628) U6.5@25.217,10.037
  Top Layer w0.45: C1124.2@22.987,27.37 MS1.2@24.456,27.37
  Top Layer w0.508: U2.5@7.061,9.808 8.499,9.808 C4.1@8.865,10.174 ; U2.5@7.061,9.808 ccw(c7.061,11.688) C4.1@8.49,10.466 ; 8.164,9.808 ccw(c8.164,10.745) C4.1@8.876,10.136 ; U9.8@15.482,6.325 16.739,6.325 16.993,6.071 ; U9.8@16.291,6.28 cw(c16.449,5.527) 16.993,6.071 ; C38.1@16.819,4.378 ccw(c16.399,4.797) 16.993,4.797 ccw(c17.586,4.797) C38.1@17.167,4.378 ; C38.1@17.039,4.204 C38.1@16.993,4.204 16.993,6.071 ; R17.1@18.644,2.554 R17.1@18.644,2.599 ; U9.3@20.282,8.865 22.333,8.865 23.26,9.792 C39.1@23.47,9.792 ; R512.2@21.209,32.45 22.288,33.529 R22.2@22.288,33.63 ; 22.327,12.802 24.702,12.802 C30.2@24.816,12.687 ; 22.692,9.223 cw(c23.47,8.446) C39.1@23.47,9.546 ; 23.343,20.676 23.343,23.686 ; 23.928,12.802 cw(c23.928,11.774) C30.2@24.655,12.501 ; v3@24.541,13.492 cw(c23.877,12.828) C30.2@24.816,12.828 ; v3@24.562,13.476 cw(c24.221,12.885) C30.2@24.88,13.062 ; C30.2@24.641,12.834 ccw(c24.232,13.183) v3(24.613,13.564) 24.816,13.36 C30.2@24.816,12.687 ; C30.2@24.655,12.849 ccw(c24.266,13.238) 24.816,13.238 ; v3@24.816,13.299 ccw(c25.453,13.299) C30.2@25.003,12.849 ; C30.2@24.829,12.675 C30.2@24.816,12.687
  Top Layer w0.635: D2.2@1.626,25.629 1.626,14.961 3.772,12.814 3.772,11.036 v3(3.785,11.024) ; v3@6.438,10.297 ccw(c6.074,11.215) C5.1@7.061,11.215 ; v3@6.446,10.224 cw(c6.329,9.502) U2.5@7.061,9.502 ; C5.1@6.742,11.276 cw(c5.971,10.505) 7.061,10.505 ; C5.1@6.871,11.405 C5.1@7.061,11.215 ; U2.5@6.928,9.807 ccw(c6.452,9.785) v3(6.452,10.262) 7.061,10.262 ; U2.5@7.061,9.808 7.061,10.262 ; R21.2@12.509,12.04 R20.2@12.509,13.691 ; C36.2@17.207,24.865 cw(c16.654,24.312) 17.436,24.312 ; C36.2@17.336,24.994 17.436,24.894 C35.1@17.436,23.47 ; 21.692,23.686 23.267,23.686 ; 7.061,10.262 C5.1@7.061,11.215
  Top Layer w0.762: C4.1@8.865,10.174 8.865,9.967 9.695,9.137 ; v3@10.124,8.461 cw(c10.442,9.137) 9.695,9.137 ; v3@10.133,8.458 cw(c10.161,8.923) 9.695,8.923 ; v3(10.135,8.484) 9.695,8.923 ; v3(11.532,10.135) 11.913,10.516 11.913,11.444 R21.2@12.509,12.04 ; v3@11.55,10.117 ccw(c10.673,10.993) 11.913,10.993 ; 11.913,10.4 cw(c14.077,10.4) R21.2@12.557,11.94 ; 11.913,11.181 cw(c12.667,11.181) R21.2@12.522,11.922 ; 9.695,8.923 9.695,9.137
  Bottom Layer w0.508: v3(24.133,6.46) 25.493,6.46 26.137,5.817 v3(26.772,5.817) ; v3(24.613,13.564) 24.613,13.945 25.756,15.088 v3(25.883,15.088) ; v3@24.714,13.564 cw(c25.879,13.564) 25.055,14.387 ; 25.492,14.824 cw(c25.883,14.434) v3@25.883,14.986 ; v3@27.589,10.317 cw(c26.863,9.591) 27.889,9.591 ; v3(27.661,10.389) 27.661,10.516 27.889,10.287 27.889,9.144 v3(28.677,8.357)
  Bottom Layer w0.635: v3(3.785,11.024) 5.69,11.024 v3(6.452,10.262)
  Bottom Layer w0.762: v3@10.109,8.484 cw(c10.661,8.484) 10.271,8.874 ; v3(10.135,8.484) 10.135,8.738 v3(11.532,10.135) ; v3@14.3,13.565 cw(c14.707,13.537) 14.707,13.945 ; v3@14.308,13.582 cw(c15.184,12.705) 15.184,13.945 ; v3(14.326,13.564) 14.707,13.945 ; R14.1@15.762,13.945 14.707,13.945
VCC_ANA: C6.1 C7.1 L1.2 U3.5 | length 8.1
  Top Layer w0.508: C7.1@11.015,32.567 cw(c10.242,31.794) 11.335,31.794 ; C7.1@11.189,32.741 11.335,32.595 U3.5@11.335,31.151
  Top Layer w0.762: C7.1@11.189,32.741 11.189,34.342 11.366,34.519 12.641,34.519 L1.2@13.056,34.104 ; 11.189,33.775 cw(c11.859,33.775) C6.1@11.385,34.249 ; C6.1@11.766,34.519 cw(c11.766,32.814) L1.2@12.971,34.019
VCC_UNREG: 1.2 2.2 3.2 4.2 C57.1 U100.6 | length 67.8
  Top Layer w0.45: C57.1@35.56,11.9 36.34,11.12 U100.6@37.006,11.12
  Top Layer w2.159: 4.2@5.461,51.308 3.2@5.461,48.429 2.2@5.461,45.551 1.2@5.461,42.672 5.461,41.402 6.731,40.132 29.337,40.132 32.639,36.83 32.639,12.954 33.8,11.793 C57.1@35.349,11.793
pads on no net: CONN2.0 CONN4.4 CONN4.6 CONN11.0 Debug.4 Debug.6 H23.0 H23.2 H23.3 H23.5 J7.1@47.676,24.562 J7.1@76.378,3.962 J7.21 J7.29 J7.38 J7.40 J7.49 MG1.3 MG1.5 MG1.6 MG1.7 MG1.14 MG1.15 MS1.5 MS1.6 Power.6 U1.2 U1.4 U1.11 U1.12 U1.18 U1.19 U1.38 U1.41 U1.42 U4.2 U4.3 U4.4 U4.5 U4.14 U4.15 U4.16 U4.17 U4.19 U4.21 U4.22 U45.4 U100.2 U201.3 U201.5 U201.6 U201.7 U201.9 U201.10 U201.11 U201.12 U201.13 U201.21 U201.22 U201.23 U201.25 U201.27 U201.28 U201.29 U201.31 U1001.1@37.084,29.845 U1001.1@37.084,56.515 U1001.1@77.724,29.845 U1001.1@77.724,56.515 U1001.21 U1001.29 U1001.38 U1001.40 U1001.49
copper on no net: | length 1.4
  Top Layer w0.508: 9.695,5.127 v3(9.695,6.52)

## Polygon pours and split planes (outlines as drawn)
GND on Top Layer "OP-GND1" (solid, remove dead copper, pour order 6): 27.432,34.163 27.432,32.004 29.015,32.004 29.015,34.163
V_SYS on Top Layer "VSYS-TOP" (solid, remove dead copper, pour order 5): 57.15,33.655 57.15,35.941 60.325,35.941 60.452,35.814 60.452,4.445 58.928,4.445 58.674,4.699 58.547,4.826 58.547,7.874 58.293,7.874 57.658,8.509
VCC on Top Layer "VCC-OP" (solid, remove dead copper, pour order 7): 33.528,0 ccw(c33.528,2.54) 36.068,2.54 36.068,5.461 36.068,33.528 ccw(c33.528,33.528) 33.528,36.068 2.667,36.068 2.54,36.068 ccw(c2.54,33.528) 0,33.528 0,11.557 0,2.54 ccw(c2.54,2.54) 2.54,0 3.048,0
GND on Top Layer "GND-TOP" (solid, remove dead copper, pour order 16): 0,-1.905 0,57.46 cw(c2.54,57.46) 2.54,60 76.581,60 77.46,60 cw(c77.46,57.46) 80,57.46 80,6.477 80,0.635 cw(c77.46,0.635) 77.46,-1.905 73.533,-1.905
GND on Bottom Layer "Bottom Layer-GND" (solid, remove dead copper, pour order 17): -0.127,-1.651 81.016,-1.651 81.016,59.873 -0.127,59.873

## Keep-outs
Top Layer:
  circle w0.1: c4.769,56.515 r2.7
  circle w0.254: c37.084,29.845 r1.024
  circle w0.254: c47.676,24.562 r2.7
  circle w0.254: c77.724,29.845 r3
  circle w0.1: c4.769,1.069 r2.7
  circle w0.1: c4.769,1.069 r1.5
  circle w0.254: c77.724,56.515 r3
  circle w0.254: c37.084,56.515 r2.7
  circle w0.254: c37.084,29.845 r3
  circle w0.254: c76.378,3.962 r3
Bottom Layer:
  circle w0.1: c4.769,56.515 r2.7
  circle w0.254: c47.676,24.562 r2.7
  circle w0.254: c77.724,29.845 r3
  circle w0.254: c77.724,56.515 r3
  circle w0.254: c37.084,29.845 r3
  circle w0.1: c4.769,1.069 r2.7
  circle w0.254: c37.084,56.515 r2.7
  circle w0.254: c76.378,3.962 r3
Keep-Out Layer:
  region: 42.799,6.858 42.799,1.016 42.672,0.889 56.007,0.889 56.007,6.858
  lines w0.025: -0.127,-1.651 81.016,-1.651 81.016,59.873 -0.127,59.873 -0.127,-1.651
  lines w0.154: 42.799,0.889 42.799,6.858 56.007,6.858 56.007,0.889 42.799,0.889
  text "CUTOUT" at 43.561,3.175 h2

## Other copper
Top Layer:
  pour cut-out: 11.024,36.019 11.024,27.788 12.294,26.518 19.66,26.518 21.819,28.677 21.819,36.019

## Silkscreen, mask and mechanical layers (free items; w line width, h text height)
Top Overlay:
  circle w0.254: c24.613,8.357 r0.127
  region: 13.144,55.088 13.144,55.342 13.398,55.342 13.398,56.104 13.144,56.104 13.144,56.358 13.779,56.358 14.16,55.977 14.541,56.358 15.176,56.358 15.176,56.104 14.922,56.104 14.922,55.342 15.176,55.342 15.176,55.088 14.414,55.088 14.414,55.342 14.668,55.342 14.668,56.104 14.16,55.596 13.652,56.104 13.652,55.342 13.906,55.342 13.906,55.088
  lines w0.154: 7.747,56.87 20.701,56.87 ; 15.494,56.87 15.494,58.775 ; 7.747,54.584 7.747,58.775 20.701,58.775 20.701,54.584 7.747,54.584
  text "Team Elevate" at 8.509,57.404 h1.25
  text "Rev. 3" at 16.256,57.315 h0.75
  text "Mark Schulte" at 18.033,55.565 h0.5
  text "EECS473" at 8.482,55.473 h0.5
  text "SIG" at 6.731,52.959 h1
  text "+" at 4.953,52.705 h1.52
  text "-" at 2.413,52.451 h1.52
  text "#Confidence" at 11.049,47.625 h1
  text "5V" at 14.986,43.307 h1
  text "" at 5.842,33.147 h3.5
  text "Status" at 1.499,28.55 h1.52
  text "+3.3V" at 29.464,26.035 h1.27
  text "SBL" at 29.591,24.765 h1.27
  text "CC3D" at 8.611,24.74 h2.54
  text "Power" at 1.626,23.724 h1.52
  text "Flexi" at 5.309,3.658 h1.4
  text "Main" at 27.788,3.658 h1.27
  text "Port" at 5.563,2.642 h1.4
  text "Port" at 27.788,2.642 h1.4
Bottom Overlay:
  text "B" at 14.91,33.528 h4.06
  text "Rev. C" at 13.97,32.258 h1.52
  text "A" at 26.899,28.55 h7.62
  text "www.OpenPilot.org" at 0.908,11.83 h1.52 r270
  text "GND" at 29.82,10.77 h0.76
  text "NRST" at 29.82,9.881 h0.76
  text "IO" at 29.82,8.865 h0.76
  text "CLK" at 29.82,7.468 h0.76
  text "SWD" at 33.63,4.547 h1.02
  text "Copter" at 31.261,3.067 h2.03
  text "3D" at 10.56,1.67 h3.05
  text "Control" at 31.261,1.289 h2.03
Mechanical 1:
  the board outline again, w0.025
Mechanical 15:
  lines w0.178: 15.342,27.335 20.676,27.335 20.676,32.669 15.342,32.669 15.342,27.335
Mechanical 16:
  lines w0.254: 6.071,18.009 6.071,24.994 10.516,24.994 10.516,18.009 6.071,18.009

## Dimensions
77.724,29.845 to 77.724,56.515 on Dimensions
77.724,56.515 to 37.084,56.515 on Dimensions
4.769,1.069 to 76.378,3.962 on Dimensions
4.769,1.069 to 4.769,56.515 on Dimensions

## Text inside footprints (layer, text, board x,y; h text height)
MG1: Bottom Overlay "Z" at 29.43,33.73 h1 r90; Bottom Overlay "x" at 28.261,31.902 h1 r90; Bottom Overlay "Y" at 27.305,32.627 h1 r90; Bottom Overlay "X" at 29.327,30.664 h1 r90